# EAGLE board BMS_25 (EAGLE 9.6.2), part 1 of 2
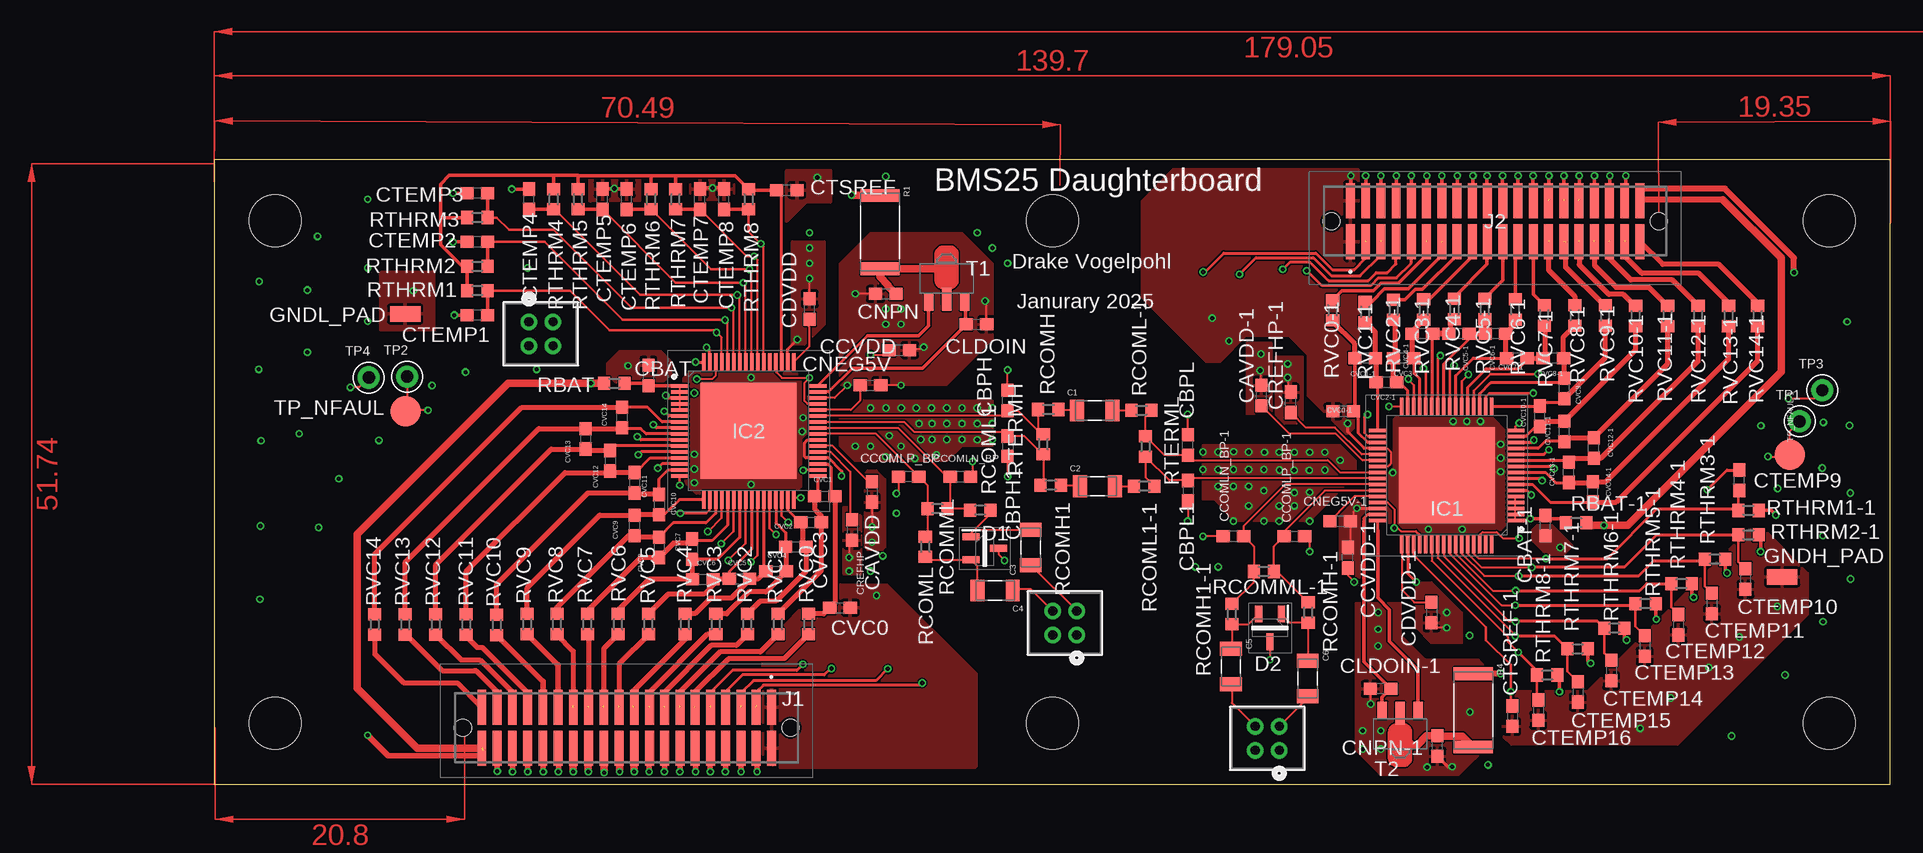
[diagram p0: board, top side]
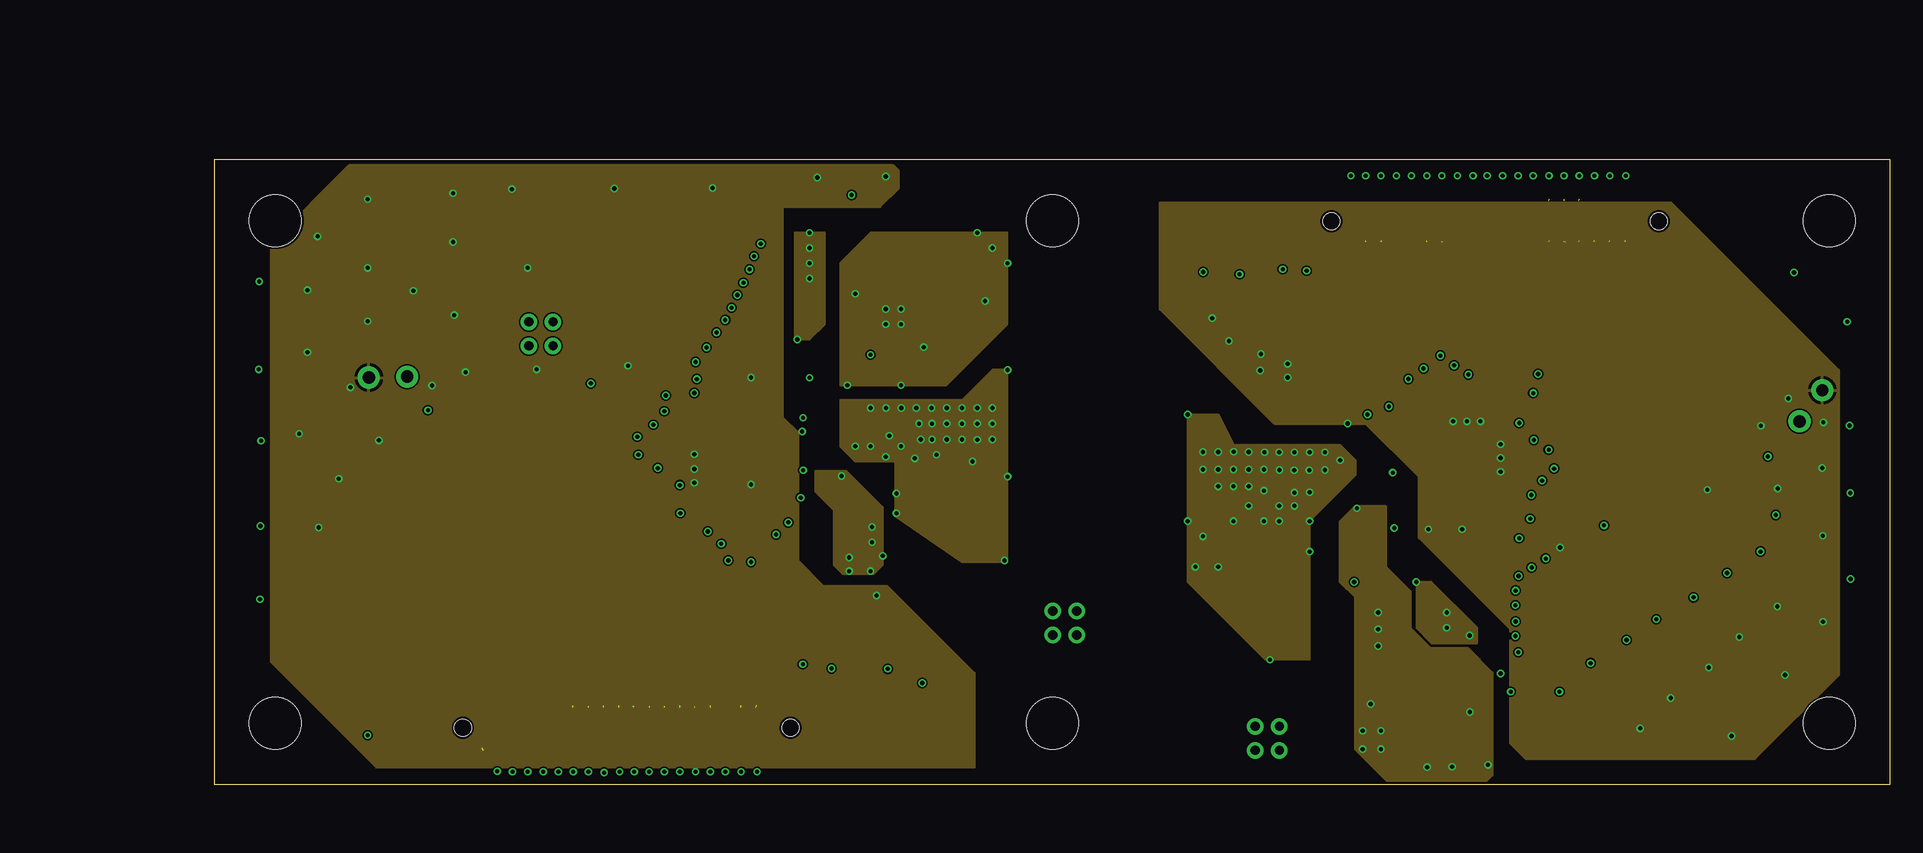
[diagram p1: board, inner layer Route2]
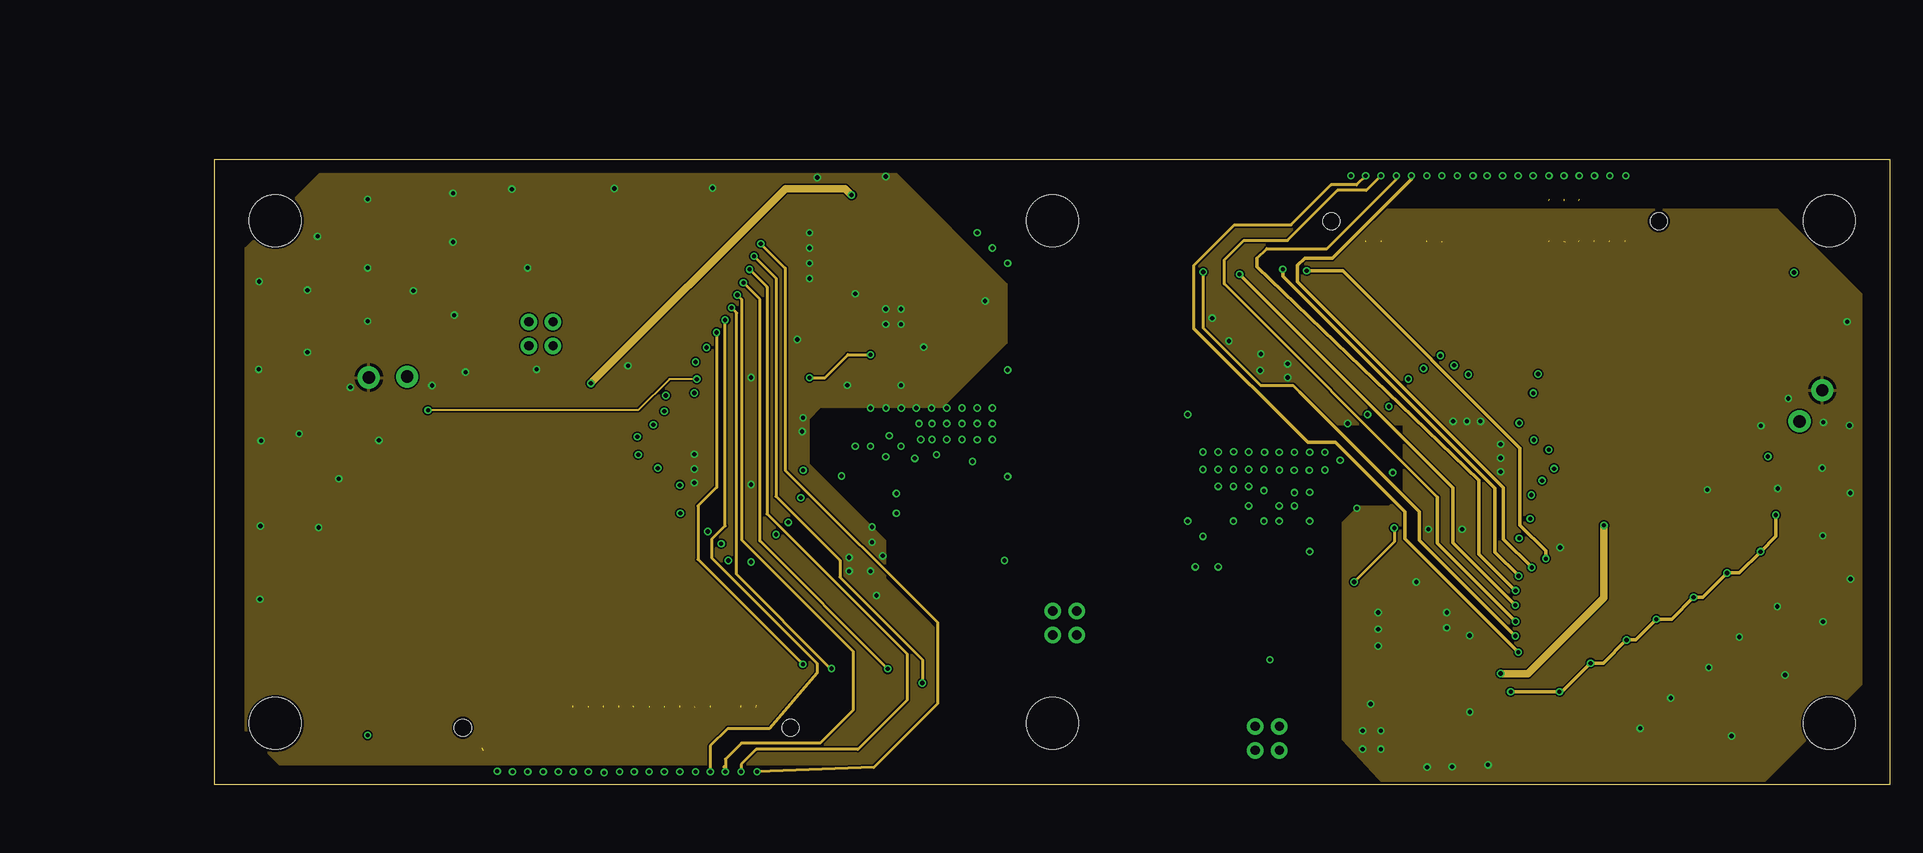
[diagram p2: board, inner layer Route15]
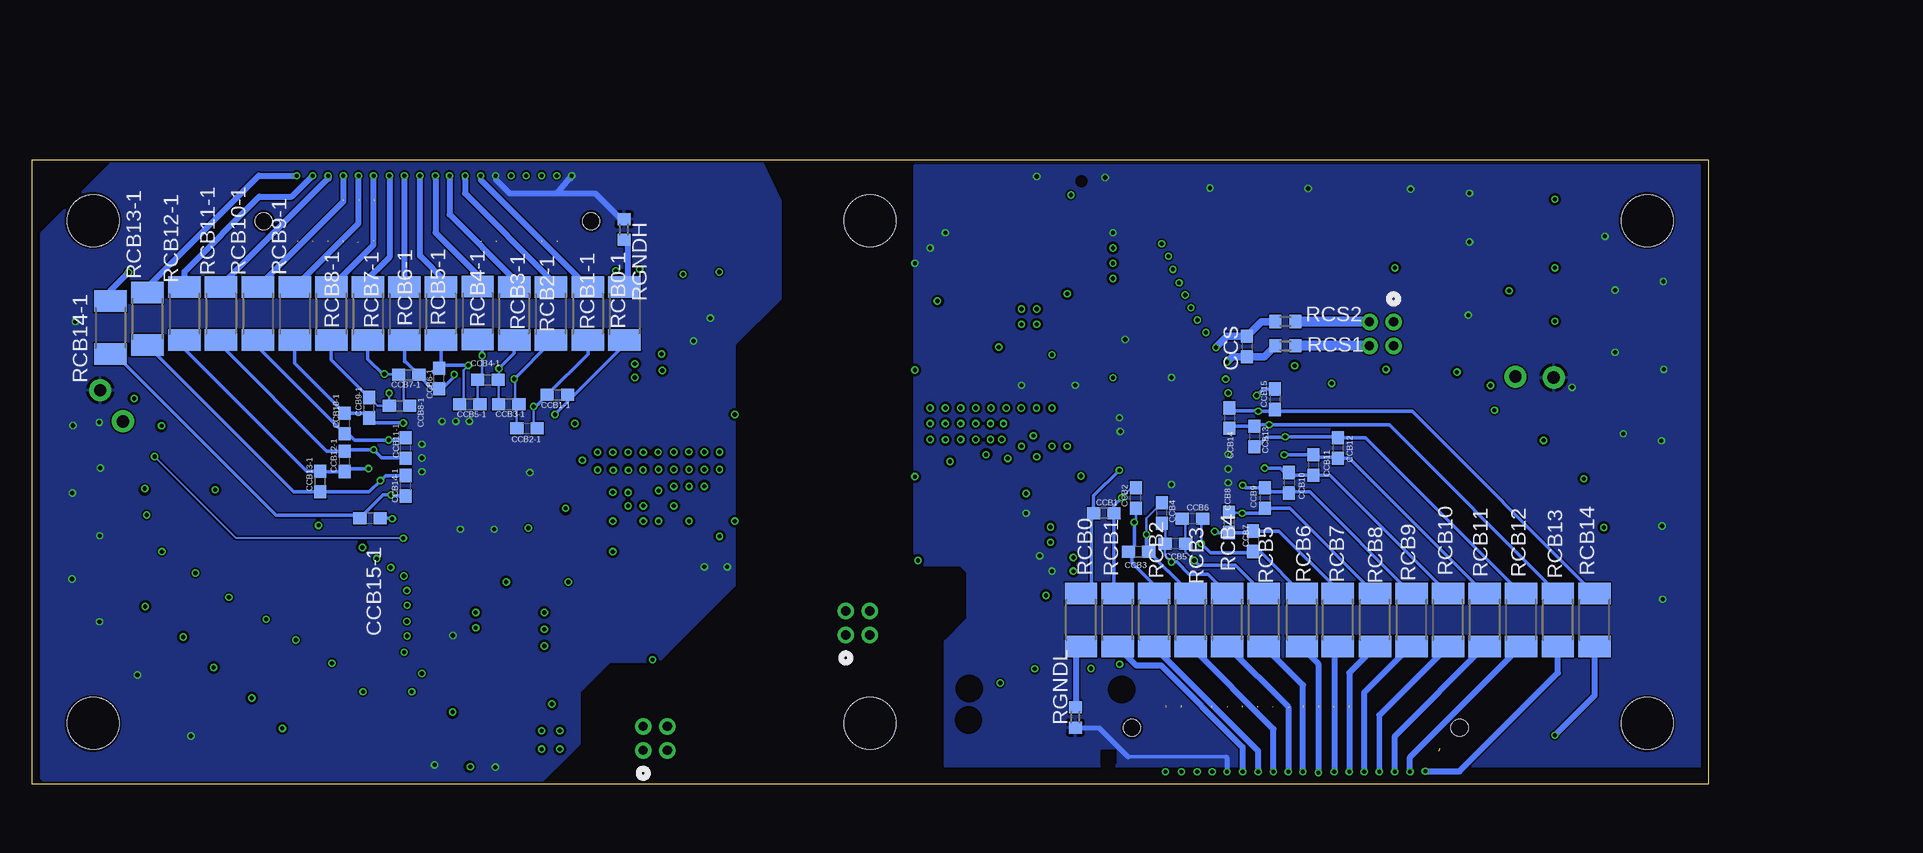
[diagram p3: board, bottom side, seen from below]

Size 139.7 x 52.07 mm. Coordinates in mm from the lower left corner, seen from the top.
Outline: 0,0 139.7,0 139.7,52.07 0,52.07 0,0
Copper layers (1+2*15+16): Top 0.035mm / dielectric 0.2mm / Route2 0.0175mm / dielectric 1.065mm / Route15 0.0175mm / dielectric 0.2mm / Bottom 0.035mm
Design rules "jlcpcb-4layers": minimum track width 3.5mil, minimum drill 0.2mm, track to track 5mil, track to pad 0.2mm, pad to pad 5mil, via to via 0.5mm, smd to smd 5mil, copper to edge 0.2mm, drill to drill 6mil, minimum pad ring 10mil, minimum via ring 0.13mm, stop-mask expansion 0.05mm, vias tented up to drill 16mil, thermal gap 10mil
Holes 4.32 mm at 5.08,46.99 5.08,5.08 134.62,46.99 134.62,5.08 69.85,46.99 69.85,5.08
bRestrict: area 58.2,31.1 to 58.8,31.6; area 59.5,31.1 to 60,31.6; area 60.8,31.1 to 61.3,31.6; area 62.1,31.1 to 62.6,31.6; area 63.3,31.1 to 63.8,31.6; area 64.6,31.1 to 65.1,31.6; area 64.6,29.8 to 65.1,30.3; area 55.7,31.1 to 56.2,31.6; area 57,31.1 to 57.5,31.6; area 54.4,31.1 to 54.9,31.6; area 60.8,29.8 to 61.3,30.3; area 62.1,29.8 to 62.6,30.3; 120 more areas

## Footprints (pad centres in the part's own frame; a part is rotated, then mirrored left to right if it is on the bottom)
CAPC3216X120N = smd 1.16 x 1.82: 1 -1.475,0; 2 1.475,0
C0603 = smd 1.1 x 1: 1 -0.85,0; 2 0.85,0
CON4_2X2_UF_DF11_HIR = drill 0.762 pad 1.27: 1 0,0; 2 0,2.007; 3 -2.007,0; 4 -2.007,2.007
SOT95P255X150-3N = smd 1.4 x 0.6: 1 -1.15,0.95; 2 -1.15,-0.95; 3 1.15,0
SMD1,27-2,54 = smd 1.27 x 2.54: 1 0,0
QFP50P1200X1200X120-65N = smd 1.475 x 0.3: 1 -5.738,3.75; 2 -5.738,3.25; 3 -5.738,2.75; 4 -5.738,2.25; 5 -5.738,1.75; 6 -5.738,1.25; 7 -5.738,0.75; 8 -5.738,0.25; 9 -5.738,-0.25; 10 -5.738,-0.75; 11 -5.738,-1.25; 12 -5.738,-1.75; 13 -5.738,-2.25; 14 -5.738,-2.75; 15 -5.738,-3.25; 16 -5.738,-3.75; 33 5.738,-3.75; 34 5.738,-3.25; 35 5.738,-2.75; 36 5.738,-2.25; 37 5.738,-1.75; 38 5.738,-1.25; 39 5.738,-0.75; 40 5.738,-0.25; 41 5.738,0.25; 42 5.738,0.75; 43 5.738,1.25; 44 5.738,1.75; 45 5.738,2.25; 46 5.738,2.75; 47 5.738,3.25; 48 5.738,3.75 | smd 0.3 x 1.475: 17 -3.75,-5.738; 18 -3.25,-5.738; 19 -2.75,-5.738; 20 -2.25,-5.738; 21 -1.75,-5.738; 22 -1.25,-5.738; 23 -0.75,-5.738; 24 -0.25,-5.738; 25 0.25,-5.738; 26 0.75,-5.738; 27 1.25,-5.738; 28 1.75,-5.738; 29 2.25,-5.738; 30 2.75,-5.738; 31 3.25,-5.738; 32 3.75,-5.738; 49 3.75,5.738; 50 3.25,5.738; 51 2.75,5.738; 52 2.25,5.738; 53 1.75,5.738; 54 1.25,5.738; 55 0.75,5.738; 56 0.25,5.738; 57 -0.25,5.738; 58 -0.75,5.738; 59 -1.25,5.738; 60 -1.75,5.738; 61 -2.25,5.738; 62 -2.75,5.738; 63 -3.25,5.738; 64 -3.75,5.738 | smd 8 x 8: 65 0,0
TFM-120-ZZ-XXX-D-A = smd 0.74 x 2.92: 1 -12.065,-1.715; 2 -12.065,1.715; 3 -10.795,-1.715; 4 -10.795,1.715; 5 -9.525,-1.715; 6 -9.525,1.715; 7 -8.255,-1.715; 8 -8.255,1.715; 9 -6.985,-1.715; 10 -6.985,1.715; 11 -5.715,-1.715; 12 -5.715,1.715; 13 -4.445,-1.715; 14 -4.445,1.715; 15 -3.175,-1.715; 16 -3.175,1.715; 17 -1.905,-1.715; 18 -1.905,1.715; 19 -0.635,-1.715; 20 -0.635,1.715; 21 0.635,-1.715; 22 0.635,1.715; 23 1.905,-1.715; 24 1.905,1.715; 25 3.175,-1.715; 26 3.175,1.715; 27 4.445,-1.715; 28 4.445,1.715; 29 5.715,-1.715; 30 5.715,1.715; 31 6.985,-1.715; 32 6.985,1.715; 33 8.255,-1.715; 34 8.255,1.715; 35 9.525,-1.715; 36 9.525,1.715; 37 10.795,-1.715; 38 10.795,1.715; 39 12.065,-1.715; 40 12.065,1.715 | hole 1.42: -13.655,0; 13.655,0
RESC6331X65N = smd 1.07 x 3.27: 1 -3.055,0; 2 3.055,0
R0603 = smd 1 x 1.1: 1 -0.85,0; 2 0.85,0
R2010 = smd 1.8 x 2.7: 1 -2.2,0; 2 2.2,0
SOT89-BCE = smd 0.8 x 1.4: B -1.499,-1.981; E 1.499,-1.981 | smd 0.8 x 1.9: C 0,-1.727
KEYSTONE_5002 = drill 1.02: TP 0,0
B2,54 = smd 2.54 x 2.54: TP 0,0

## Placement (x,y rotation side)
C1  C1206C105K5RACTU  [CAPC3216X120N]  73.38,31.17 0 top
C2  C1206C105K5RACTU  [CAPC3216X120N]  73.61,24.84 0 top
C3  C1206C105K5RACTU  [CAPC3216X120N]  68.05,19.74 90 top
C4  C1206C105K5RACTU  [CAPC3216X120N]  65.07,16.15 180 top
C5  C1206C105K5RACTU  [CAPC3216X120N]  84.73,9.83 270 top
C6  C1206C105K5RACTU  [CAPC3216X120N]  91.14,8.84 270 top
CAVDD  1uF  [C0603]  54.82,24.38 270 top
CAVDD-1  1uF  [C0603]  87.28,32.41 90 top
CBAT  10nF  [C0603]  36.17,34.08 270 top
CBAT-1  10nF  [C0603]  110.95,21.56 90 top
CBPH  220pF  [C0603]  66.12,32 90 top
CBPH1  220pF  [C0603]  66.12,28.19 270 top
CBPL  220pF  [C0603]  81.13,28.29 90 top
CBPL1  220pF  [C0603]  81.13,24.48 270 top
CCB1  0.47uF  [C0603]  50.37,22.6 180 bottom
CCB1-1  0.47uF  [C0603]  95.92,32.46 0 bottom
CCB2  0.47uF  [C0603]  47.71,23.87 90 bottom
CCB2-1  0.47uF  [C0603]  98.46,29.66 0 bottom
CCB3  0.47uF  [C0603]  47.48,19.37 180 bottom
CCB3-1  0.47uF  [C0603]  99.98,31.69 0 bottom
CCB4  0.47uF  [C0603]  45.52,22.62 90 bottom
CCB4-1  0.47uF  [C0603]  101.71,33.73 0 bottom
CCB5  0.47uF  [C0603]  44.4,20.06 180 bottom
CCB5-1  0.47uF  [C0603]  103.23,31.69 0 bottom
CCB6  0.47uF  [C0603]  42.98,22.14 180 bottom
CCB6-1  0.47uF  [C0603]  105.77,33.83 90 bottom
CCB7  0.47uF  [C0603]  37.93,20.26 270 bottom
CCB7-1  0.47uF  [C0603]  108.31,34.13 0 bottom
CCB8  0.47uF  [C0603]  39.96,21.84 270 bottom
CCB8-1  0.47uF  [C0603]  109.07,31.54 0 bottom
CCB9  0.47uF  [C0603]  36.96,23.87 270 bottom
CCB9-1  0.47uF  [C0603]  111.61,31.39 90 bottom
CCB10  0.47uF  [C0603]  34.93,25.14 270 bottom
CCB10-1  0.47uF  [C0603]  113.64,30.07 90 bottom
CCB11  0.47uF  [C0603]  32.9,26.61 270 bottom
CCB11-1  0.47uF  [C0603]  108.57,28.03 90 bottom
CCB12  0.47uF  [C0603]  30.87,28.04 270 bottom
CCB12-1  0.47uF  [C0603]  113.64,26.92 90 bottom
CCB13  0.47uF  [C0603]  37.82,29 270 bottom
CCB13-1  0.47uF  [C0603]  115.68,25.24 90 bottom
CCB14  0.47uF  [C0603]  39.91,30.52 270 bottom
CCB14-1  0.47uF  [C0603]  108.56,24.89 90 bottom
CCB15  0.47uF  [C0603]  36.12,32.1 270 bottom
CCB15-1  0.47uF  [C0603]  111.54,22.17 180 bottom
CCOMLN_BP  220pF  [C0603]  62.18,25.65 0 top
CCOMLN_BP-1  220pF  [C0603]  84.94,20.67 180 top
CCOMLP_BP  220pF  [C0603]  57.87,25.65 180 top
CCOMLP_BP-1  220pF  [C0603]  90.02,20.67 0 top
CCS  0.47uF  [C0603]  38.46,36.49 270 bottom
CCVDD  4.7uF  [C0603]  57.1,36.19 0 top
CCVDD-1  4.7uF  [C0603]  94.47,18.89 90 top
CDVDD  1uF  [C0603]  49.61,39.62 90 top
CDVDD-1  1uF  [C0603]  101.45,14.32 270 top
CLDOIN  0.1uF  [C0603]  63.53,38.35 0 top
CLDOIN-1  0.1uF  [C0603]  97.21,7.97 180 top
CNEG5V  0.1uF  [C0603]  54.69,33.27 0 top
CNEG5V-1  0.1uF  [C0603]  93.83,21.94 0 top
CNPN  0.22uF  [C0603]  55.96,40.89 0 top
CNPN-1  0.22uF  [C0603]  101.95,3.2 90 top
COMMH  DF11-4DP-2DSA(24)  [CON4_2X2_UF_DF11_HIR]  88.76,2.83 0 top
COMML  DF11-4DP-2DSA(24)  [CON4_2X2_UF_DF11_HIR]  71.88,12.45 0 top
CREFHP  1uF  [C0603]  53.17,21.2 270 top
CREFHP-1  1uF  [C0603]  89.72,31.85 90 top
CTEMP1  0.47uF  [C0603]  21.92,39.11 180 top
CTEMP2  0.47uF  [C0603]  21.92,45.21 180 top
CTEMP3  0.47uF  [C0603]  21.92,49.27 180 top
CTEMP4  0.47uF  [C0603]  26.24,48.76 90 top
CTEMP5  0.47uF  [C0603]  32.34,48.76 90 top
CTEMP6  0.47uF  [C0603]  34.37,48.76 90 top
CTEMP7  0.47uF  [C0603]  40.47,48.76 90 top
CTEMP8  0.47uF  [C0603]  42.5,48.76 90 top
CTEMP9  0.47uF  [C0603]  127.11,25.34 90 top
CTEMP10  0.47uF  [C0603]  127.61,17.11 270 top
CTEMP11  0.47uF  [C0603]  124.82,15.08 270 top
CTEMP12  0.47uF  [C0603]  122.03,13.3 270 top
CTEMP13  0.47uF  [C0603]  119.23,11.53 270 top
CTEMP14  0.47uF  [C0603]  116.44,9.49 270 top
CTEMP15  0.47uF  [C0603]  113.64,7.72 270 top
CTEMP16  0.47uF  [C0603]  110.34,6.19 270 top
CTSREF  1uF  [C0603]  47.71,49.52 0 top
CTSREF-1  1uF  [C0603]  108.18,5.68 270 top
CVC0  0.47uF  [C0603]  52.15,14.73 0 top
CVC0-1  0.47uF  [C0603]  94.09,31.08 180 top
CVC1  0.47uF  [C0603]  50.88,24 0 top
CVC1-1  0.47uF  [C0603]  95.92,35.53 180 top
CVC2  0.47uF  [C0603]  49.74,21.84 0 top
CVC2-1  0.47uF  [C0603]  97.69,33.5 180 top
CVC3  0.47uF  [C0603]  48.47,19.81 0 top
CVC3-1  0.47uF  [C0603]  99.12,35.53 180 top
CVC4  0.47uF  [C0603]  46.82,17.75 0 top
CVC4-1  0.47uF  [C0603]  100.69,37.56 180 top
CVC5  0.47uF  [C0603]  43.77,17.14 0 top
CVC5-1  0.47uF  [C0603]  103.74,37.56 180 top
CVC6  0.47uF  [C0603]  40.72,17.09 0 top
CVC6-1  0.47uF  [C0603]  106.79,37.56 180 top
CVC7  0.47uF  [C0603]  39.83,19.6 270 top
CVC7-1  0.47uF  [C0603]  108.56,35.53 180 top
CVC8  0.47uF  [C0603]  37.06,19.75 270 top
CVC8-1  0.47uF  [C0603]  111.61,35.53 180 top
CVC9  0.47uF  [C0603]  35.01,21.58 270 top
CVC9-1  0.47uF  [C0603]  112.53,32.99 90 top
CVC10  0.47uF  [C0603]  37.09,23.31 270 top
CVC10-1  0.47uF  [C0603]  110.49,30.68 90 top
CVC11  0.47uF  [C0603]  35.03,25.14 270 top
CVC11-1  0.47uF  [C0603]  112.53,29.41 90 top
CVC12  0.47uF  [C0603]  33,26.97 270 top
CVC12-1  0.47uF  [C0603]  114.97,28.04 90 top
CVC13  0.47uF  [C0603]  30.94,28.8 270 top
CVC13-1  0.47uF  [C0603]  112.88,26 90 top
CVC14  0.47uF  [C0603]  33.96,30.58 270 top
CVC14-1  0.47uF  [C0603]  114.91,24.38 90 top
D1  ESDAVLC6-2BLY  [SOT95P255X150-3N]  64.22,19.68 0 top
D2  ESDAVLC6-2BLY  [SOT95P255X150-3N]  87.99,13.05 270 top
GNDH_PAD  [SMD1,27-2,54]  130.69,17.29 270 top
GNDL_PAD  [SMD1,27-2,54]  15.9,39.21 90 top
IC1  PBQ79656PAPTQ1  [QFP50P1200X1200X120-65N]  102.72,25.75 180 top
IC2  PBQ79656PAPTQ1  [QFP50P1200X1200X120-65N]  44.53,29.46 0 top
J1  TFM-120-02-L-D-A  [TFM-120-ZZ-XXX-D-A]  34.37,4.72 180 top
J2  TFM-120-02-L-D-A  [TFM-120-ZZ-XXX-D-A]  106.76,46.94 0 top
R1  RC2512JK-07560RL  [RESC6331X65N]  55.47,46.02 270 top
R4  RC2512JK-07560RL  [RESC6331X65N]  104.93,6.17 270 top
RBAT  30  [R0603]  33.35,33.42 0 top
RBAT-1  30  [R0603]  113.52,21.81 180 top
RCB0  50  [R2010]  52.28,13.71 90 bottom
RCB0-1  50  [R2010]  90.33,39.24 270 bottom
RCB1  50  [R2010]  49.23,13.71 90 bottom
RCB1-1  50  [R2010]  93.38,39.24 270 bottom
RCB2  50  [R2010]  46.18,13.71 90 bottom
RCB2-1  50  [R2010]  96.47,39.24 270 bottom
RCB3  50  [R2010]  43.13,13.71 90 bottom
RCB3-1  50  [R2010]  99.52,39.24 270 bottom
RCB4  50  [R2010]  40.09,13.71 90 bottom
RCB4-1  50  [R2010]  102.57,39.29 270 bottom
RCB5  50  [R2010]  37.04,13.71 90 bottom
RCB5-1  50  [R2010]  105.62,39.24 270 bottom
RCB6  50  [R2010]  33.86,13.71 90 bottom
RCB6-1  50  [R2010]  108.67,39.24 270 bottom
RCB7  50  [R2010]  30.87,13.71 90 bottom
RCB7-1  50  [R2010]  111.71,39.24 270 bottom
RCB8  50  [R2010]  27.77,13.71 90 bottom
RCB8-1  50  [R2010]  114.76,39.24 270 bottom
RCB9  50  [R2010]  24.72,13.71 90 bottom
RCB9-1  50  [R2010]  117.81,39.24 270 bottom
RCB10  50  [R2010]  21.67,13.71 90 bottom
RCB10-1  50  [R2010]  120.88,39.24 270 bottom
RCB11  50  [R2010]  18.62,13.71 90 bottom
RCB11-1  50  [R2010]  123.96,39.24 270 bottom
RCB12  50  [R2010]  15.57,13.71 90 bottom
RCB12-1  50  [R2010]  127,39.24 270 bottom
RCB13  50  [R2010]  12.53,13.71 90 bottom
RCB13-1  50  [R2010]  130.1,38.81 270 bottom
RCB14  50  [R2010]  9.48,13.71 90 bottom
RCB14-1  50  [R2010]  133.18,38.07 270 bottom
RCOMH  49  [R0603]  69.52,31.24 180 top
RCOMH1  49  [R0603]  69.72,24.94 180 top
RCOMH1-1  49  [R0603]  84.82,14.19 90 top
RCOMH-1  49  [R0603]  91.17,14.32 90 top
RCOML  49  [R0603]  59.26,19.81 90 top
RCOML1  49  [R0603]  63.83,22.85 180 top
RCOML1-1  49  [R0603]  77.51,24.86 0 top
RCOML-1  49  [R0603]  77.27,31.17 0 top
RCOMML  1k  [R0603]  60.28,22.98 0 top
RCOMML-1  1k  [R0603]  87.48,17.75 0 top
RCS1  10  [R0603]  35.23,36.54 0 bottom
RCS2  10  [R0603]  35.23,38.58 0 bottom
RGNDH  0  [R0603]  90.36,46.24 270 bottom
RGNDL  0  [R0603]  52.74,5.58 90 bottom
RTERMH  1k  [R0603]  69.09,28.35 90 top
RTERML  1k  [R0603]  77.61,28.16 270 top
RTHRM1  10k  [R0603]  21.92,41.14 0 top
RTHRM1-1  10k  [R0603]  127.87,22.83 180 top
RTHRM2  10k  [R0603]  21.92,43.17 0 top
RTHRM2-1  10k  [R0603]  127.87,20.8 180 top
RTHRM3  10k  [R0603]  21.92,47.24 0 top
RTHRM3-1  10k  [R0603]  125.07,18.77 180 top
RTHRM4  10k  [R0603]  28.27,48.76 270 top
RTHRM4-1  10k  [R0603]  122.28,16.73 180 top
RTHRM5  10k  [R0603]  30.31,48.76 270 top
RTHRM5-1  10k  [R0603]  119.28,15.06 180 top
RTHRM6  10k  [R0603]  36.4,48.76 270 top
RTHRM6-1  10k  [R0603]  116.69,13.03 180 top
RTHRM7  10k  [R0603]  38.43,48.76 270 top
RTHRM7-1  10k  [R0603]  113.64,11.3 180 top
RTHRM8  10k  [R0603]  44.53,48.76 270 top
RTHRM8-1  10k  [R0603]  111.1,9.11 180 top
RVC0  100  [R0603]  49.52,13.36 90 top
RVC0-1  100  [R0603]  93.21,39.51 270 top
RVC1  100  [R0603]  46.98,13.36 90 top
RVC1-1  100  [R0603]  95.93,39.38 270 top
RVC2  100  [R0603]  44.44,13.36 90 top
RVC2-1  100  [R0603]  98.29,39.56 270 top
RVC3  100  [R0603]  41.79,13.36 90 top
RVC3-1  100  [R0603]  100.8,39.56 270 top
RVC4  100  [R0603]  39.23,13.36 90 top
RVC4-1  100  [R0603]  103.36,39.6 270 top
RVC5  100  [R0603]  36.18,13.36 90 top
RVC5-1  100  [R0603]  105.89,39.6 270 top
RVC6  100  [R0603]  33.64,13.36 90 top
RVC6-1  100  [R0603]  108.44,39.59 270 top
RVC7  100  [R0603]  31.1,13.36 90 top
RVC7-1  100  [R0603]  110.85,39.09 270 top
RVC8  100  [R0603]  28.56,13.36 90 top
RVC8-1  100  [R0603]  113.39,39.09 270 top
RVC9  100  [R0603]  26.07,13.36 90 top
RVC9-1  100  [R0603]  115.93,39.09 270 top
RVC10  100  [R0603]  23.53,13.28 90 top
RVC10-1  100  [R0603]  118.47,39.04 270 top
RVC11  100  [R0603]  20.99,13.33 90 top
RVC11-1  100  [R0603]  121.14,39.04 270 top
RVC12  100  [R0603]  18.45,13.33 90 top
RVC12-1  100  [R0603]  123.68,39.04 270 top
RVC13  100  [R0603]  15.91,13.33 90 top
RVC13-1  100  [R0603]  126.22,39.04 270 top
RVC14  100  [R0603]  13.37,13.33 90 top
RVC14-1  100  [R0603]  128.63,39.04 270 top
SR  DF11-4DP-2DSA(24)  [CON4_2X2_UF_DF11_HIR]  26.22,38.55 180 top
T1  PBHV8115X, 115  [SOT89-BCE]  61.04,42.16 0 top
T2  PBHV8115X, 115  [SOT89-BCE]  98.84,4.21 180 top
TP1  5002  [KEYSTONE_5002]  132.13,30.25 0 top
TP2  5002  [KEYSTONE_5002]  16.08,33.99 0 top
TP3  5002  [KEYSTONE_5002]  134.04,32.84 0 top
TP4  5002  [KEYSTONE_5002]  12.88,33.91 0 top
TP_NFAUL  TPB2,54  [B2,54]  15.96,31.11 180 top
TP_NFAUL-1  TPB2,54  [B2,54]  131.32,27.45 0 top

## Library data of the parts
C1-C6 = C1206C105K5RACTU; AVAILABILITY: In Stock; CHECK_PRICES: https://www.snapeda.com/parts/C1206C105K5RACTU/KEMET/view-part/?ref=eda; DESCRIPTION: 1206 C 1uF Ceramic Multilayer Capacitor, 50 VDC, +125degC, X7R Dielec, +/-10% | KEMET C1206C105K5RACTU; MF: KEMET; MP: C1206C105K5RACTU; PACKAGE: 1206-2 KEMET; PRICE: None; SNAPEDA_LINK: https://www.snapeda.com/parts/C1206C105K5RACTU/KEMET/view-part/?ref=snap
CAVDD CAVDD-1 CBAT CBAT-1 CBPH CBPH1 CBPL CBPL1 CCB1 CCB1-1 CCB2 CCB2-1 CCB3 CCB3-1 CCB4 CCB4-1 CCB5 CCB5-1 CCB6 CCB6-1 CCB7 CCB7-1 CCB8 CCB8-1 CCB9 CCB9-1 CCB10 CCB10-1 CCB11 CCB11-1 CCB12 CCB12-1 CCB13 CCB13-1 CCB14 CCB14-1 CCB15 CCB15-1 CCOMLN_BP CCOMLN_BP-1 CCOMLP_BP CCOMLP_BP-1 CCS CCVDD CCVDD-1 CDVDD CDVDD-1 CLDOIN CLDOIN-1 CNEG5V CNEG5V-1 CNPN CNPN-1 CREFHP CREFHP-1 CTEMP1-CTEMP16 CTSREF CTSREF-1 CVC0 CVC0-1 CVC1 CVC1-1 CVC2 CVC2-1 CVC3 CVC3-1 CVC4 CVC4-1 CVC5 CVC5-1 CVC6 CVC6-1 CVC7 CVC7-1 CVC8 CVC8-1 CVC9 CVC9-1 CVC10 CVC10-1 CVC11 CVC11-1 CVC12 CVC12-1 CVC13 CVC13-1 CVC14 CVC14-1 = NFR23_v1.3; SPICEPREFIX: C
COMMH COMML SR = BMS24; COPYRIGHT: Copyright (C) 2023 Ultra Librarian. All rights reserved.; MANUFACTURER_PART_NUMBER: DF11-4DP-2DSA(24); MFR_NAME: Hirose
D1 D2 = ESDAVLC6-2BLY; DESCRIPTION: STMICROELECTRONICS - ESDAVLC6-2BLY - ESD Protection Device, 17 V, SOT-23, 3 Pins, 5 V, 140 W, ESDA Transil Series; HEIGHT: 1.5mm; MANUFACTURER_NAME: STMicroelectronics; MANUFACTURER_PART_NUMBER: ESDAVLC6-2BLY; MOUSER_PART_NUMBER: 511-ESDAVLC6-2BLY; MOUSER_PRICE-STOCK: https://www.mouser.co.uk/ProductDetail/STMicroelectronics/ESDAVLC6-2BLY?qs=l7cgNqFNU1iH2e21evvYsA%3D%3D
GNDH_PAD GNDL_PAD = wirepad
IC1 IC2 = PBQ79656PAPTQ1; DESCRIPTION: BQ7965x-Q1 Family of 12S, 14S, 16S Precision Automotive Battery Monitor, Balancer and Integrated Hardware Protector with up to SafeTITM-26262 ASIL-D Compliance; HEIGHT: 1.2mm; MANUFACTURER_NAME: Texas Instruments; MANUFACTURER_PART_NUMBER: PBQ79656PAPTQ1
J1 J2 = TFM-120-02-L-D-A; DESCRIPTION: High-Reliability Tiger Eye&trade; Terminal Strips, .050&quot; Pitch; HEIGHT: mm; MANUFACTURER_NAME: SAMTEC; MANUFACTURER_PART_NUMBER: TFM-120-02-L-D-A; MOUSER_PART_NUMBER: 200-TFM12002LDA; MOUSER_PRICE-STOCK: https://www.mouser.co.uk/ProductDetail/Samtec/TFM-120-02-L-D-A?qs=Cqqh%252BS766wkN4Vjd1kbN8A%3D%3D
R1 R4 = RC2512JK-07560RL
RBAT RBAT-1 RCOMH RCOMH1 RCOMH1-1 RCOMH-1 RCOML RCOML1 RCOML1-1 RCOML-1 RCOMML RCOMML-1 RCS1 RCS2 RGNDH RGNDL RTERMH RTERML RTHRM1 RTHRM1-1 RTHRM2 RTHRM2-1 RTHRM3 RTHRM3-1 RTHRM4 RTHRM4-1 RTHRM5 RTHRM5-1 RTHRM6 RTHRM6-1 RTHRM7 RTHRM7-1 RTHRM8 RTHRM8-1 RVC0 RVC0-1 RVC1 RVC1-1 RVC2 RVC2-1 RVC3 RVC3-1 RVC4 RVC4-1 RVC5 RVC5-1 RVC6 RVC6-1 RVC7 RVC7-1 RVC8 RVC8-1 RVC9 RVC9-1 RVC10 RVC10-1 RVC11 RVC11-1 RVC12 RVC12-1 RVC13 RVC13-1 RVC14 RVC14-1 = NFR23_v1.3
RCB0 RCB0-1 RCB1 RCB1-1 RCB2 RCB2-1 RCB3 RCB3-1 RCB4 RCB4-1 RCB5 RCB5-1 RCB6 RCB6-1 RCB7 RCB7-1 RCB8 RCB8-1 RCB9 RCB9-1 RCB10 RCB10-1 RCB11 RCB11-1 RCB12 RCB12-1 RCB13 RCB13-1 RCB14 RCB14-1 = rcl; SPICEPREFIX: R
T1 T2 = transistor
TP1-TP4 = 5002; MANUFACTURER: Keystone; MAXIMUM_PACKAGE_HEIGHT: 4.57 mm; PARTREV: H; SNAPEDA_PN: 5000; STANDARD: Manufacturer Recommendations
TP_NFAUL TP_NFAUL-1 = testpad

## Nets
AVDD: CAVDD.1 IC2.38
AVDD-1: CAVDD-1.1 IC1.38
BAT: J1.40 R1.1 RBAT.1 RCB14.1
BAT-1: J2.40 R4.1 RBAT-1.1 RCB14-1.1
CB0: CCB1.2 IC2.34 RCB0.2
CB0-1: CCB1-1.2 IC1.34 RCB0-1.2
CB0-IN: RCB0.1 RGNDL.2
CB0-IN-1: RCB0-1.1 RGNDH.2
CB1: CCB1.1 CCB2.2 IC2.32 RCB1.2
CB1-1: CCB1-1.1 CCB2-1.2 IC1.32 RCB1-1.2
CB1-IN: J1.14 RCB1.1
CB1-IN-1: J2.14 RCB1-1.1
CB2: CCB2.1 CCB3.2 IC2.30 RCB2.2
CB2-1: CCB2-1.1 CCB3-1.2 IC1.30 RCB2-1.2
CB2-IN: J1.16 RCB2.1
CB2-IN-1: J2.16 RCB2-1.1
CB3: CCB3.1 CCB4.2 IC2.28 RCB3.2
CB3-1: CCB3-1.1 CCB4-1.2 IC1.28 RCB3-1.2
CB3-IN: J1.18 RCB3.1
CB3-IN-1: J2.18 RCB3-1.1
CB4: CCB4.1 CCB5.2 IC2.26 RCB4.2
CB4-1: CCB4-1.1 CCB5-1.2 IC1.26 RCB4-1.2
CB4-IN: J1.20 RCB4.1
CB4-IN-1: J2.20 RCB4-1.1
CB5: CCB5.1 CCB6.2 IC2.24 RCB5.2
CB5-1: CCB5-1.1 CCB6-1.2 IC1.24 RCB5-1.2
CB5-IN: J1.22 RCB5.1
CB5-IN-1: J2.22 RCB5-1.1
CB6: CCB6.1 CCB7.2 IC2.22 RCB6.2
CB6-1: CCB6-1.1 CCB7-1.2 IC1.22 RCB6-1.2
CB6-IN: J1.24 RCB6.1
CB6-IN-1: J2.24 RCB6-1.1
CB7: CCB7.1 CCB8.2 IC2.20 RCB7.2
CB7-1: CCB7-1.1 CCB8-1.2 IC1.20 RCB7-1.2
CB7-IN: J1.26 RCB7.1
CB7-IN-1: J2.26 RCB7-1.1
CB8: CCB8.1 CCB9.2 IC2.18 RCB8.2
CB8-1: CCB8-1.1 CCB9-1.2 IC1.18 RCB8-1.2
CB8-IN: J1.28 RCB8.1
CB8-IN-1: J2.28 RCB8-1.1
CB9: CCB9.1 CCB10.2 IC2.16 RCB9.2
CB9-1: CCB9-1.1 CCB10-1.2 IC1.16 RCB9-1.2
CB9-IN: J1.30 RCB9.1
CB9-IN-1: J2.30 RCB9-1.1
CB10: CCB10.1 CCB11.2 IC2.14 RCB10.2
CB10-1: CCB10-1.1 CCB11-1.2 IC1.14 RCB10-1.2
CB10-IN: J1.32 RCB10.1
CB10-IN-1: J2.32 RCB10-1.1
CB11: CCB11.1 CCB12.2 IC2.12 RCB11.2
CB11-1: CCB11-1.1 CCB12-1.2 IC1.12 RCB11-1.2
CB11-IN: J1.34 RCB11.1
CB11-IN-1: J2.34 RCB11-1.1
CB12: CCB12.1 CCB13.2 IC2.10 RCB12.2
CB12-1: CCB12-1.1 CCB13-1.2 IC1.10 RCB12-1.2
CB12-IN: J1.36 RCB12.1
CB12-IN-1: J2.36 RCB12-1.1
CB13: CCB13.1 CCB14.2 IC2.8 RCB13.2
CB13-1: CCB13-1.1 CCB14-1.2 IC1.8 RCB13-1.2
CB13-IN: J1.38 RCB13.1
CB13-IN-1: J2.38 RCB13-1.1
CB14: CCB14.1 CCB15.2 IC2.6 RCB14.2
CB14-1: CCB14-1.1 CCB15-1.2 IC1.6 RCB14-1.2
COMHN: CBPH1.1 IC2.42 RCOMH1.2 RTERMH.1
COMHN-1: CCOMLN_BP-1.1 IC1.42 RCOMH1-1.2 RCOMML-1.1
COMHP: CBPH.1 IC2.43 RCOMH.2 RTERMH.2
COMHP-1: CCOMLP_BP-1.1 IC1.43 RCOMH-1.2 RCOMML-1.2
COMLN: CCOMLN_BP.1 IC2.41 RCOML1.2 RCOMML.2
COMLN-1: CBPL1.1 IC1.41 RCOML1-1.2 RTERML.2
COMLP: CCOMLP_BP.1 IC2.40 RCOML.2 RCOMML.1
COMLP-1: CBPL.1 IC1.40 RCOML-1.2 RTERML.1
CVDD: CCVDD.1 IC2.45 IC2.52
CVDD-1: CCVDD-1.1 IC1.45 IC1.52
DVDD: CDVDD.1 IC2.49
DVDD-1: CDVDD-1.1 IC1.49
GNDH: CAVDD-1.2 CBAT-1.1 CBPL1.2 CBPL.2 CCOMLN_BP-1.2 CCOMLP_BP-1.2 CCVDD-1.2 CDVDD-1.2 CLDOIN-1.2 CNEG5V-1.2 CNPN-1.1 CREFHP-1.2 CTEMP9.2 CTEMP10.2 CTEMP11.2 CTEMP12.2 CTEMP13.2 CTEMP14.2 CTEMP15.2 CTEMP16.2 CTSREF-1.2 CVC0-1.2 D2.3 GNDH_PAD.1 IC1.36 IC1.39 IC1.46 IC1.50 IC1.65 J2.1 J2.2 J2.12 RGNDH.1 TP3.TP
GNDL: CAVDD.2 CBAT.1 CBPH1.2 CBPH.2 CCOMLN_BP.2 CCOMLP_BP.2 CCVDD.2 CDVDD.2 CLDOIN.2 CNEG5V.2 CNPN.1 CREFHP.2 CTEMP1.2 CTEMP2.2 CTEMP3.2 CTEMP4.2 CTEMP5.2 CTEMP6.2 CTEMP7.2 CTEMP8.2 CTSREF.2 CVC0.2 D1.3 GNDL_PAD.1 IC2.36 IC2.39 IC2.46 IC2.50 IC2.65 J1.1 J1.2 J1.12 RGNDL.1 TP4.TP
ISO_COMN: C2.2 RCOML1-1.1
ISO_COMP: C1.2 RCOML-1.1
LDOIN: CLDOIN.1 IC2.47 T1.E
LDOIN-1: CLDOIN-1.1 IC1.47 T2.E
N$2: CNPN.2 R1.2 T1.C
N$6: CNEG5V.1 IC2.44
N$46: C1.1 RCOMH.1
N$47: C2.1 RCOMH1.1
N$50: C3.2 D1.1 RCOML1.1
N$51: C4.2 D1.2 RCOML.1
N$73: CNEG5V-1.1 IC1.44
N$92: CNPN-1.2 R4.2 T2.C
N$97: C6.1 D2.1 RCOMH-1.1
N$98: C5.1 D2.2 RCOMH1-1.1
N$99: C6.2 COMMH.2
N$101: C5.2 COMMH.4
N$103: C3.1 COMML.2
N$104: C4.1 COMML.4
NC_VC_CB: CBAT.2 CCB15.1 IC2.1 IC2.2 IC2.3 IC2.4 IC2.5 RBAT.2
NC_VC_CB_HIGH: CBAT-1.2 CCB15-1.1 IC1.1 IC1.2 IC1.3 IC1.4 IC1.5 RBAT-1.2
NPNB: IC2.48 T1.B
NPNB-1: IC1.48 T2.B
REFHP: CREFHP.1 IC2.37
REFHP-1: CREFHP-1.1 IC1.37
SRN: CCS.1 IC2.63 RCS2.1
SRN-IN: RCS2.2 SR.3
SRP: CCS.2 IC2.64 RCS1.1
SRP-IN: RCS1.2 SR.4
TEMP1: CTEMP1.1 IC2.61 J1.9 RTHRM1.2
TEMP2: CTEMP2.1 IC2.60 J1.10 RTHRM2.2
TEMP3: CTEMP3.1 IC2.59 J1.7 RTHRM3.2
TEMP4: CTEMP4.1 IC2.58 J1.8 RTHRM4.2
TEMP5: CTEMP5.1 IC2.57 J1.5 RTHRM5.2
TEMP6: CTEMP6.1 IC2.56 J1.6 RTHRM6.2
TEMP7: CTEMP7.1 IC2.55 J1.3 RTHRM7.2
TEMP8: CTEMP8.1 IC2.54 J1.4 RTHRM8.2
TEMP9: CTEMP9.1 IC1.61 J2.9 RTHRM1-1.2
TEMP10: CTEMP10.1 IC1.60 J2.10 RTHRM2-1.2
TEMP11: CTEMP11.1 IC1.59 J2.7 RTHRM3-1.2
TEMP12: CTEMP12.1 IC1.58 J2.8 RTHRM4-1.2
TEMP13: CTEMP13.1 IC1.57 J2.5 RTHRM5-1.2
TEMP14: CTEMP14.1 IC1.56 J2.6 RTHRM6-1.2
TEMP15: CTEMP15.1 IC1.55 J2.3 RTHRM7-1.2
TEMP16: CTEMP16.1 IC1.54 J2.4 RTHRM8-1.2
TP: IC2.62 TP2.TP TP_NFAUL.TP
TP-1: IC1.62 TP1.TP TP_NFAUL-1.TP
TSREF: CTSREF.1 IC2.51 RTHRM1.1 RTHRM2.1 RTHRM3.1 RTHRM4.1 RTHRM5.1 RTHRM6.1 RTHRM7.1 RTHRM8.1
TSREF-1: CTSREF-1.1 IC1.51 RTHRM1-1.1 RTHRM2-1.1 RTHRM3-1.1 RTHRM4-1.1 RTHRM5-1.1 RTHRM6-1.1 RTHRM7-1.1 RTHRM8-1.1
VC0: CVC0.1 CVC1.2 IC2.35 RVC0.2
VC0-1: CVC0-1.1 CVC1-1.2 IC1.35 RVC0-1.2
VC0-IN: J1.11 RVC0.1
VC0-IN-1: J2.11 RVC0-1.1
VC1: CVC1.1 CVC2.2 IC2.33 RVC1.2
VC1-1: CVC1-1.1 CVC2-1.2 IC1.33 RVC1-1.2
VC1-IN: J1.13 RVC1.1
VC1-IN-1: J2.13 RVC1-1.1
VC2: CVC2.1 CVC3.2 IC2.31 RVC2.2
VC2-1: CVC2-1.1 CVC3-1.2 IC1.31 RVC2-1.2
VC2-IN: J1.15 RVC2.1
VC2-IN-1: J2.15 RVC2-1.1
VC3: CVC3.1 CVC4.2 IC2.29 RVC3.2
VC3-1: CVC3-1.1 CVC4-1.2 IC1.29 RVC3-1.2
VC3-IN: J1.17 RVC3.1
VC3-IN-1: J2.17 RVC3-1.1
VC4: CVC4.1 CVC5.2 IC2.27 RVC4.2
VC4-1: CVC4-1.1 CVC5-1.2 IC1.27 RVC4-1.2
VC4-IN: J1.19 RVC4.1
VC4-IN-1: J2.19 RVC4-1.1
VC5: CVC5.1 CVC6.2 IC2.25 RVC5.2
VC5-1: CVC5-1.1 CVC6-1.2 IC1.25 RVC5-1.2
VC5-IN: J1.21 RVC5.1
VC5-IN-1: J2.21 RVC5-1.1
VC6: CVC6.1 CVC7.2 IC2.23 RVC6.2
VC6-1: CVC6-1.1 CVC7-1.2 IC1.23 RVC6-1.2
VC6-IN: J1.23 RVC6.1
VC6-IN-1: J2.23 RVC6-1.1
VC7: CVC7.1 CVC8.2 IC2.21 RVC7.2
VC7-1: CVC7-1.1 CVC8-1.2 IC1.21 RVC7-1.2
VC7-IN: J1.25 RVC7.1
VC7-IN-1: J2.25 RVC7-1.1
VC8: CVC8.1 CVC9.2 IC2.19 RVC8.2
VC8-1: CVC8-1.1 CVC9-1.2 IC1.19 RVC8-1.2
VC8-IN: J1.27 RVC8.1
VC8-IN-1: J2.27 RVC8-1.1
VC9: CVC9.1 CVC10.2 IC2.17 RVC9.2
VC9-1: CVC9-1.1 CVC10-1.2 IC1.17 RVC9-1.2
VC9-IN: J1.29 RVC9.1
VC9-IN-1: J2.29 RVC9-1.1
VC10: CVC10.1 CVC11.2 IC2.15 RVC10.2
VC10-1: CVC10-1.1 CVC11-1.2 IC1.15 RVC10-1.2
VC10-IN: J1.31 RVC10.1
VC10-IN-1: J2.31 RVC10-1.1
VC11: CVC11.1 CVC12.2 IC2.13 RVC11.2
VC11-1: CVC11-1.1 CVC12-1.2 IC1.13 RVC11-1.2
VC11-IN: J1.33 RVC11.1
VC11-IN-1: J2.33 RVC11-1.1
VC12: CVC12.1 CVC13.2 IC2.11 RVC12.2
VC12-1: CVC12-1.1 CVC13-1.2 IC1.11 RVC12-1.2
VC12-IN: J1.35 RVC12.1
VC12-IN-1: J2.35 RVC12-1.1
VC13: CVC13.1 CVC14.2 IC2.9 RVC13.2
VC13-1: CVC13-1.1 CVC14-1.2 IC1.9 RVC13-1.2
VC13-IN: J1.37 RVC13.1
VC13-IN-1: J2.37 RVC13-1.1
VC14: CVC14.1 IC2.7 RVC14.2
VC14-1: CVC14-1.1 IC1.7 RVC14-1.2
VC14-IN: J1.39 RVC14.1
VC14-IN-1: J2.39 RVC14-1.1